# Altium PCB PCB.PcbDoc
Units mm, origin at the board's own origin, x right, y up, seen from the top; angles counter-clockwise.
Board outline 50 x 45 mm, 2 copper layers (Top Layer, Bottom Layer); 37 components, 26 nets, 126 pads, 36 vias.
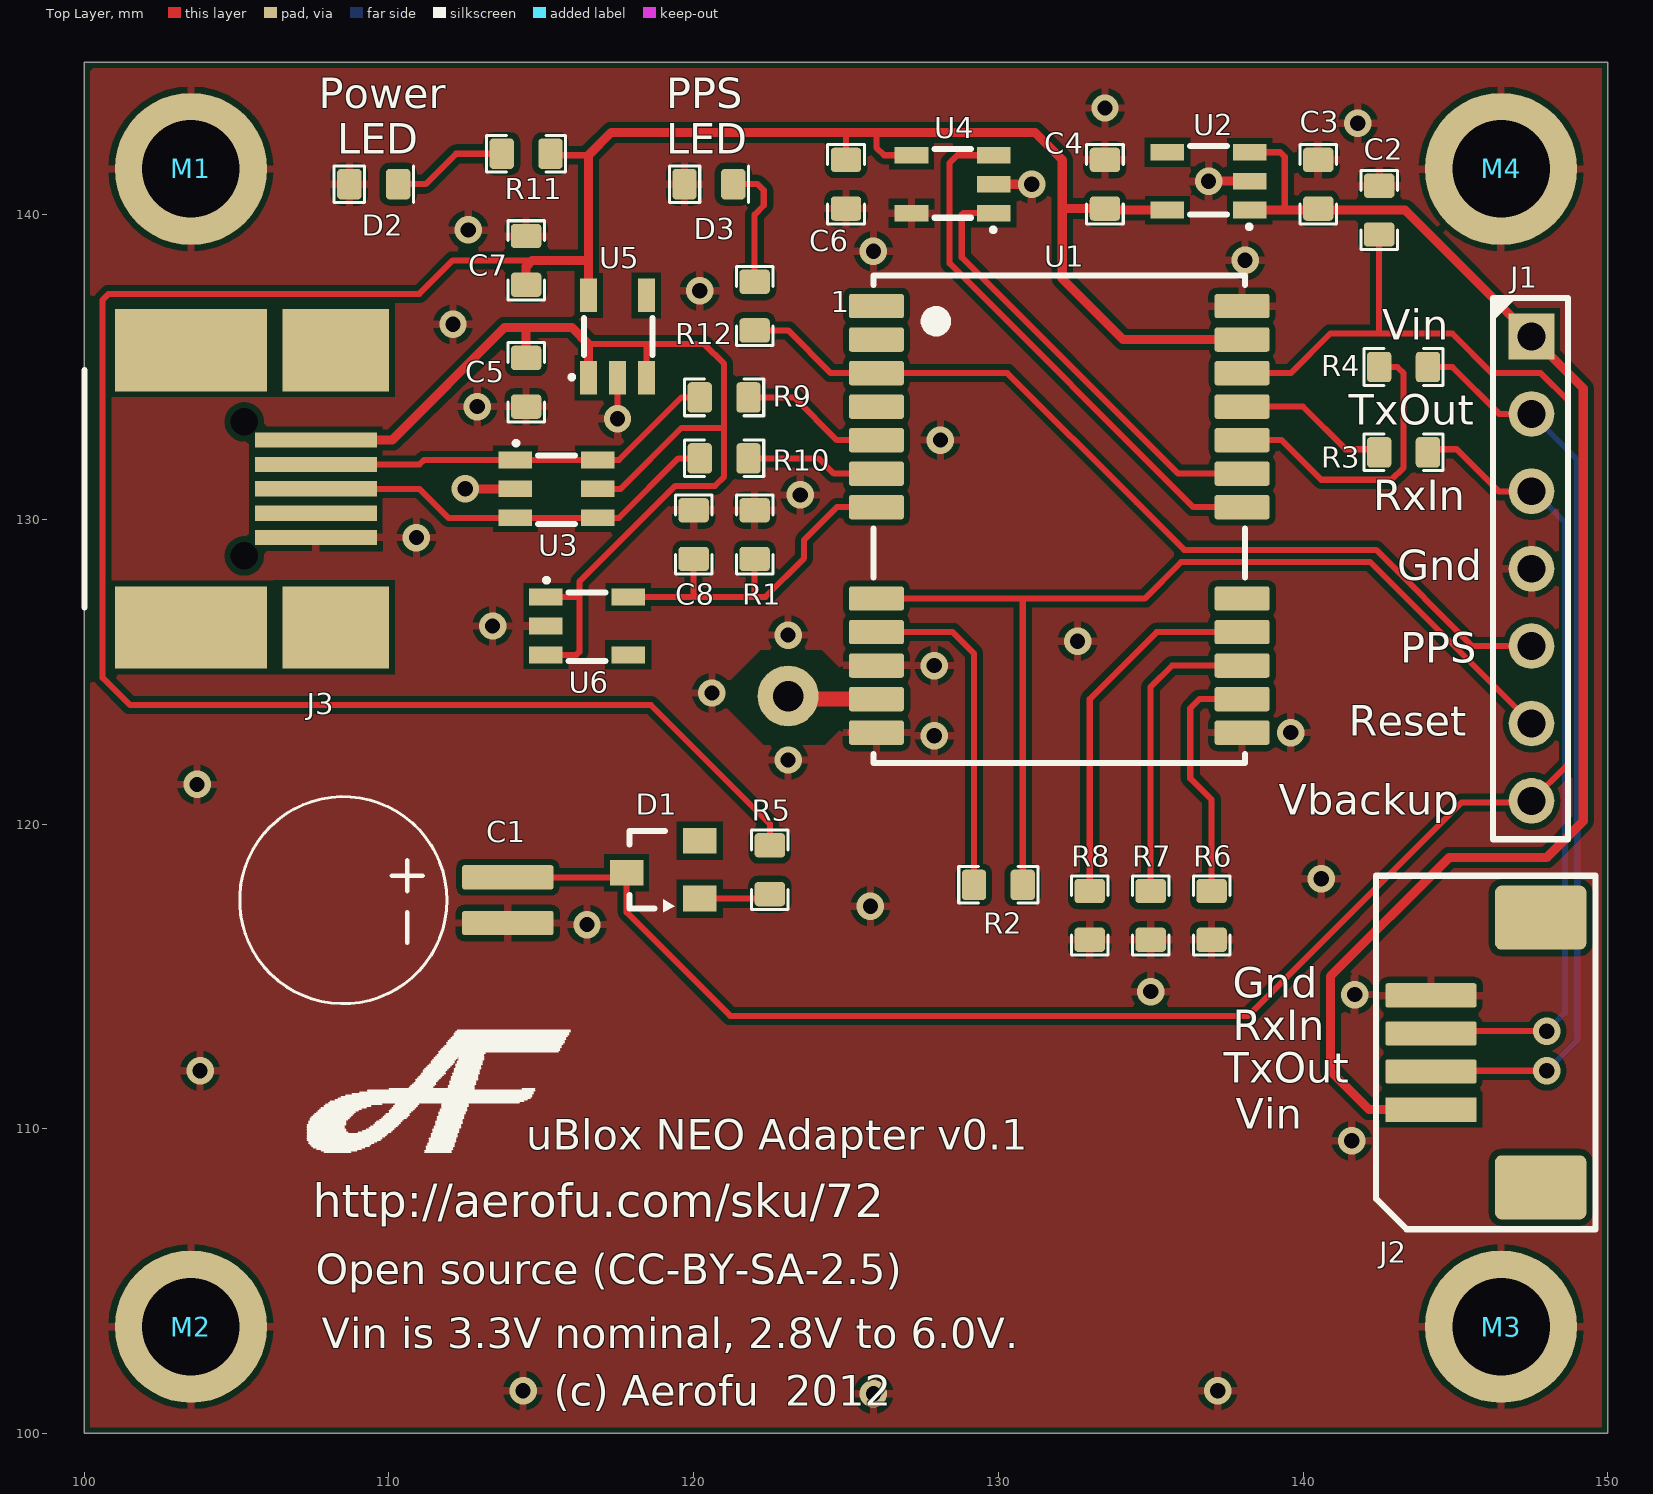
[diagram p0: Top Layer view]
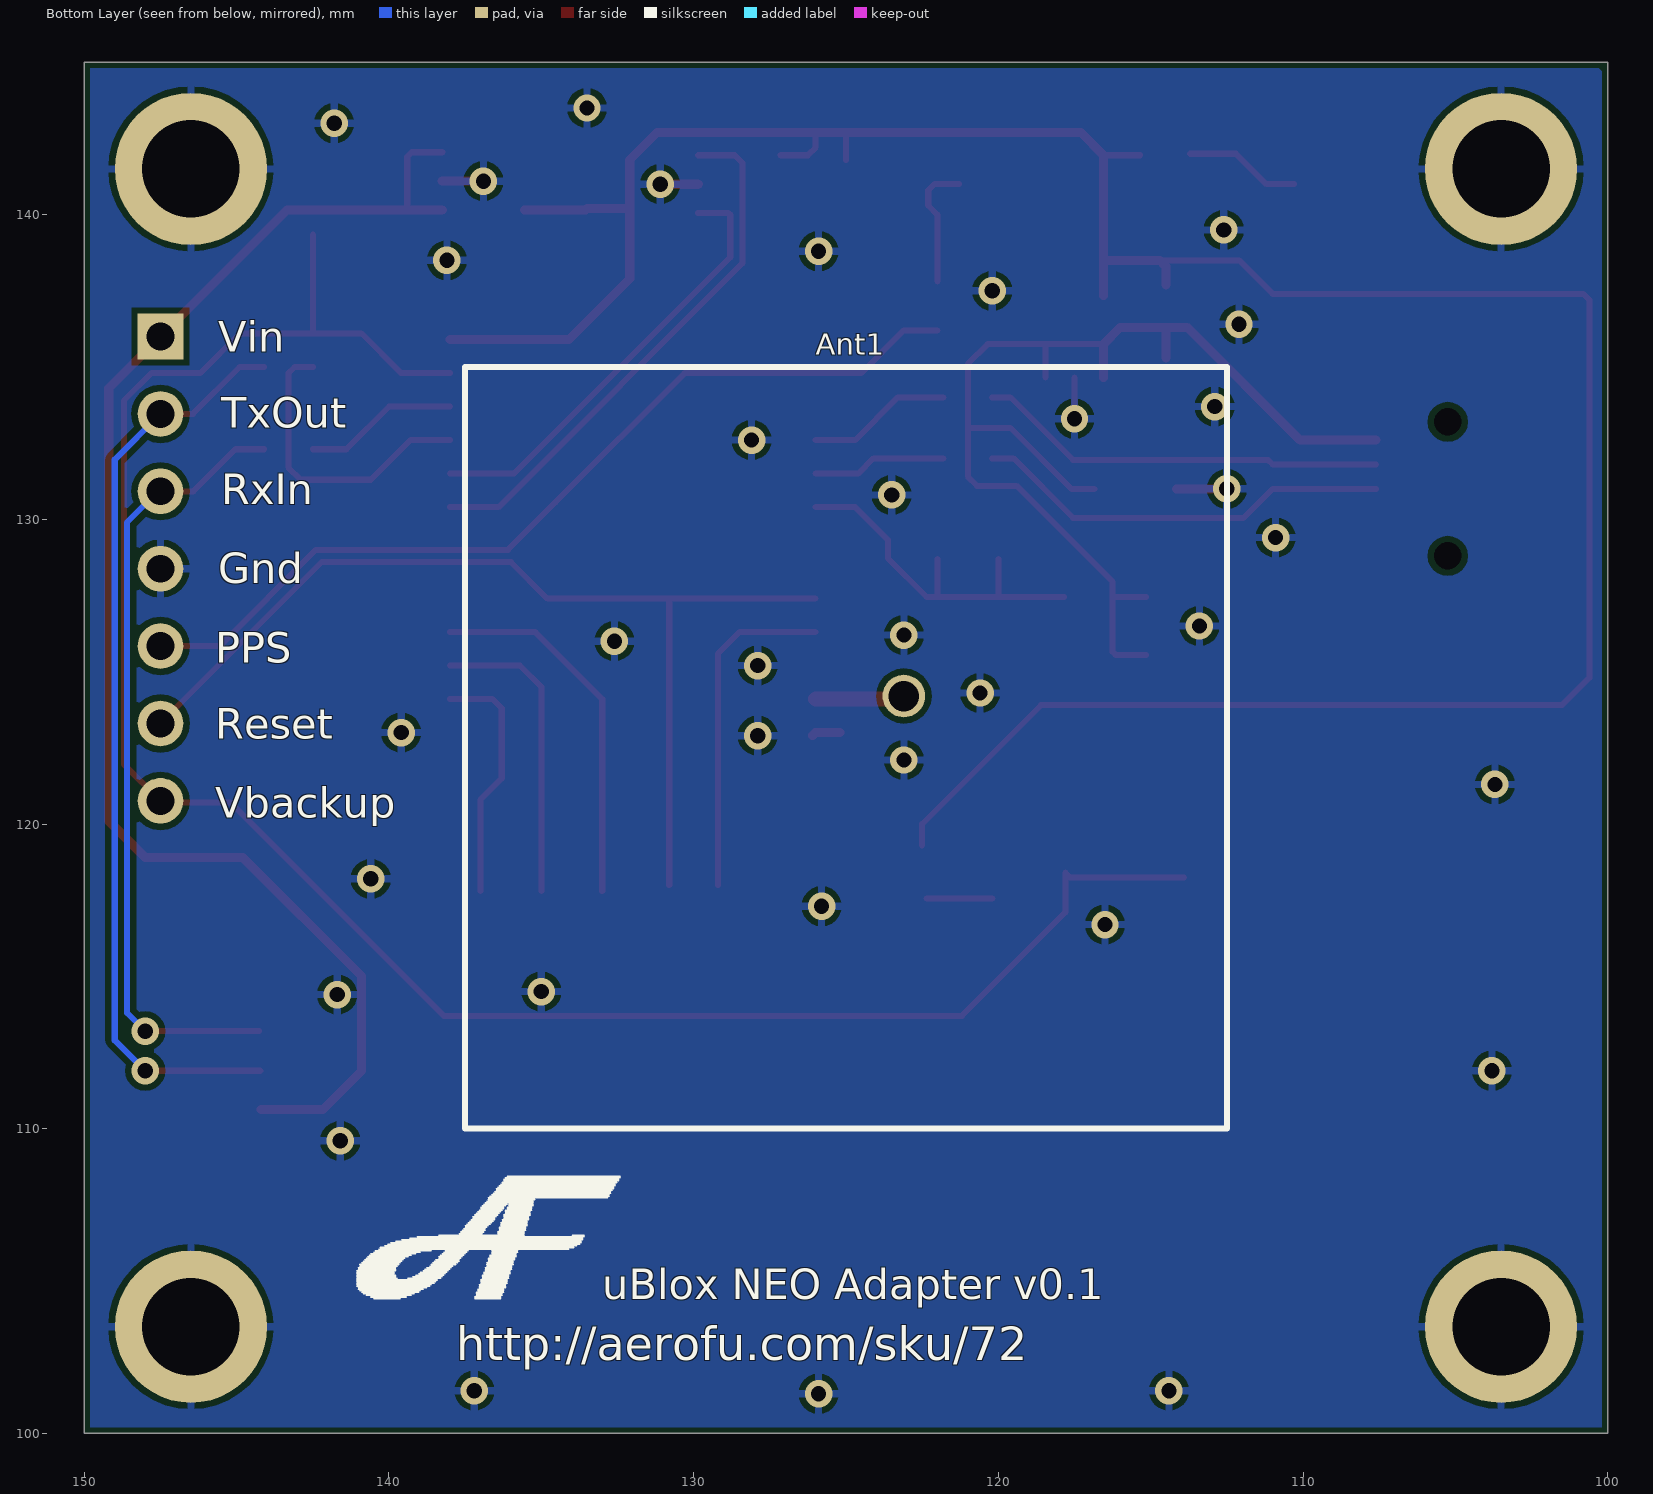
[diagram p1: Bottom Layer view, seen from below]

## Layer stack, top to bottom
Top Layer: signal copper 0.0356
Dielectric: dielectric 0.32, FR-4, Dk 4.8
Bottom Layer: signal copper 0.0356

## Board outline
100,145 150,145 150,100 100,100

## Design rules (kind name [scope] priority, off if disabled: settings)
Clearance [All] p1: gap=0.2
ComponentClearance [All] p1: gap=0.254 collisioncheckmode=0 verticalgap=0.254
HoleSize [All] p1: absolutevalues=TRUE maxlimit=5 minlimit=0.4 maxpercent=80.000 minpercent=20.000
PolygonConnect [All] p1: connectstyle=Relief reliefconductorwidth=0.254 reliefentries=4 polygonreliefangle="90 Angle"
RoomDefinition Schematic [InComponentClass('Schematic')] p1: confinementstyle=ConfineOut formatcopy=TRUE lockcomponents=FALSE outline 151.22,101.52 158.92,101.52 158.92,105.72 151.22,105.72
RoutingVias [All] p1: holewidth=0.711 width=1.27 viastyle="Through Hole" minholewidth=0.711 minwidth=1.27 maxholewidth=0.711 maxwidth=1.27
SolderMaskExpansion [All] p1: expansion=0.102
TestPointUsage [All] p1: valid=0 allowmultiple=FALSE
Testpoint [All] p1: side=15 testpointundercomponent=TRUE minsize=1.016 maxsize=2.54 preferedsize=1.524 minholesize=0 maxholesize=1.016 preferedholesize=0.813 testpointgrid=0.025 style=1023 order=0-112345678
Width [All] p1: maxlimit=0.5 minlimit=0.2 preferedwidth=0.2
17 further rules are at their usual default settings.

## Components (designator, comment, footprint, x,y, rotation, side; value= is the part's Value field where it differs from the comment)
Ant1 "Patch Antenna" Patch-25mm 125,122.5 r0 bottom locked
C1 "Capacitor_SuperCap" Supercap-6.8mm 108.5,117.5 r90 top
C2 "Capacitor" 0603 142.5,140.15 r270 top
C3 "Capacitor" 0603 140.5,141 r270 top
C4 "Capacitor" 0603 133.5,141 r270 top
C5 "Capacitor" 0603 114.5,134.5 r90 top
C6 "Capacitor" 0603 125,141 r90 top
C7 "Capacitor" 0603 114.5,138.5 r270 top
C8 "Capacitor" 0603 120,129.5 r270 top
D1 "Diode BAS116" SOT23-3 119,118.5 r90 top
D2 "Green" "0603 - LED" 109.5,141 r180 top
D3 "Red" "0603 - LED" 120.5,141 r180 top
J1 "SPI Header" HDR7X1-2.54 147.5,136 r0 top
J2 "Socket 4x1" "Molex Picoblade 4 Pin socket" 146,112.5 r90 top
J3 "USB-MiniB" Mini-USB 100,131 r0 top
M1 "Screw Hole" "MOUNT HOLE"#1 89,132 r0 top
M2 "Screw Hole" "MOUNT HOLE"#2 89.5,102 r0 top
M3 "Screw Hole" "MOUNT HOLE"#3 144.5,100.5 r0 top
M4 "Screw Hole" "MOUNT HOLE"#4 144,133.5 r0 top
R1 "Resistor" 0603 122,129.5 r270 top
R2 "Resistor" 0603 130,118 r180 top
R3 "Resistor" 0603 143.3,132.2 r180 top
R4 "Resistor" 0603 143.3,135 r180 top
R5 "Resistor" 0603 122.5,118.5 r90 top
R6 "Resistor" 0603 137,117 r90 top
R7 "Resistor" 0603 135,117 r90 top
R8 "Resistor" 0603 133,117 r90 top
R9 "Resistor" 0603 121,134 r180 top
R10 "Resistor" 0603 121,132 r180 top
R11 "Resistor" 0603 114.5,142 r0 top
R12 "Resistor" 0603 122,137 r270 top
U1 "uBlox-Neo" uBlox-NEO 132,130 r0 top
U2 "LT1761ES5-3" Sot23-5 136.9,141.1 r90 top
U3 "ESD Protection" Sot23-6 115.5,131 r270 top
U4 "32k EEPROM" Sot23-5 128.5,141 r90 top
U5 "LT1761ES5-3" Sot23-5 117.5,136 r0 top
U6 "TC1015-3.3VCT713" Sot23-5 116.5,126.5 r270 top

## Footprints (in the part's own frame and the unit in brackets; to place one, negate y for a bottom-side part, rotate by r counter-clockwise, add the part's x,y. Pads: shape width x height; smd on the part's side, far side on the other; paste and mask are expansions set on the pad)
0603 [mm] "Chip Capacitor; Body 1.6 x 0.8 mm (LxW typ)"
  rrect30% 0.8x1 smd: 1(-0.8,0) 2(0.8,0)
  silkscreen extent -1.3,-0.6 1.3,0.6
"0603 - LED" [mm] "LED Body 1.6 x 0.8 mm (LxW typ)"
  rrect30% 0.8x1 smd: 1(-0.8,0) 2(0.8,0)
  silkscreen extent -1.3,-0.6 1.3,0.6
HDR7X1-2.54 [mm] "Connector; Header; 7 Position 1 row"
  rect 1.5x1.5 hole 0.914: 1(0,0)
  round 1.5 hole 0.914: 2(0,-2.54) 3(0,-5.08) 4(0,-7.62) 5(0,-10.16) 6(0,-12.7) 7(0,-15.24)
  silkscreen extent -1.27,-16.5 1.2,1.27
Mini-USB [mm] "Suits: Hirose UX60SA-MB-5ST, TYCO 1734035-2, Molex 54819-0572"
  rect 5x2.7 smd: 0(3.5,-4.55) 0(3.5,4.55)
  rect 0x0 hole 0.9 unplated: 0(5.25,-2.2) 0(5.25,2.2)
  rect 3.5x2.7 smd: 0(8.25,-4.55) 0(8.25,4.55)
  rect 4x0.5 smd: 1(7.6,1.6) 2(7.6,0.8) 3(7.6,0) 4(7.6,-0.8) 5(7.6,-1.6)
  silkscreen extent 0,-3.9 0,3.9
"Molex Picoblade 4 Pin socket" [mm] "Connector; Header; 6 Position"
  rrect20% 2.1x3 smd: 0(-4.425,-1.8) 0(4.425,-1.8)
  rect 0.8x3 smd: 1(-1.875,1.8)
  rrect20% 0.8x3 smd: 2(-0.625,1.8) 3(0.625,1.8) 4(1.875,1.8)
  silkscreen extent -5.8,-3.6 5.8,3.6
"MOUNT HOLE"#1 [mm] "3.2mm mount hole"
  round 5 hole 3.2 unplated: 1(14.5,9.5)
"MOUNT HOLE"#2 [mm] "3.2mm mount hole"
  round 5 hole 3.2 unplated: 1(14,1.5)
"MOUNT HOLE"#3 [mm] "3.2mm mount hole"
  round 5 hole 3.2 unplated: 1(2,3)
"MOUNT HOLE"#4 [mm] "3.2mm mount hole"
  round 5 hole 3.2 unplated: 1(2.5,8)
Patch-25mm [mm] "25 mm Patch antenna, RHCP center pin location."
  round 1.4 / inner round 1.4 / far side round 2 hole 1: 1(-1.9,-1.7)
  silkscreen extent -12.5,-12.5 12.5,12.5
SOT23-3 [mm] "SOT-23; 3 Leads; Body 3.0 x 2.6 mm, inc. leads (LxW max)"
  rect 0.85x1.1 smd: 1(-0.95,-1.2) 2(0.95,-1.2) 3(-0.1,1.2)
  silkscreen extent -1.4,-0.38 1.28,1.1
Sot23-5 [mm] "Sot23-5L For Maxim, body 1.6 wide, pitch 0.95mm. 15th space between pads."
  rect 0.55x1.1 smd: 1(-0.95,-1.35) 2(0,-1.35) 3(0.95,-1.35) 4(0.95,1.35) 5(-0.95,1.35)
  silkscreen extent -1.51,-1.34 1.15,0.6
Sot23-6 [mm] "Sot23-6, body 1.6 wide, pitch 0.95mm. 15th space between pads."
  rect 0.55x1.1 smd: 1(-0.95,-1.35) 2(0,-1.35) 3(0.95,-1.35) 4(0.95,1.35) 5(0,1.35) 6(-0.95,1.35)
  silkscreen extent -1.51,-1.34 1.15,0.6
Supercap-6.8mm [mm] "Elna Supercap or equivelant"
  rrect20% 0.8x3 smd: 1(-0.75,-5.4) 2(0.75,-5.4)
  silkscreen extent -3.4,-3.4 3.4,3.4
uBlox-NEO [mm] "Footprint for uBlox NEO-5Q or similar."
  rrect20% 1.8x0.8 smd: 1(-6,7) 2(-6,5.9) 3(-6,4.8) 4(-6,3.7) 5(-6,2.6) 6(-6,1.5) 7(-6,0.4) 8(-6,-2.6) 9(-6,-3.7) 10(-6,-4.8) 11(-6,-5.9) 12(-6,-7) 13(6,-7) 14(6,-5.9) 15(6,-4.8) 16(6,-3.7) 17(6,-2.6) 18(6,0.4) 19(6,1.5) 20(6,2.6) 21(6,3.7) 22(6,4.8) 23(6,5.9) 24(6,7)
  silkscreen extent -6.1,-8 6.1,8

## Part data
C1: "SuperCap"
C2 C3 C4 C5 C6 C7 C8: "Capacitor (Semiconductor SIM Model)"
D1: "Silicon Low Leakage Diode"
D2 D3: library part LED
J1: library part "7 Way header 7x1"
J2: library part "4 Way Socket 4x1", "Socket"
J3: "USB Connector"
M1 M2 M3 M4: "Mount Hole"
U2 U5 U6: library part Regulator-5Pin
U3: library part USBLC6-2, "USBLC6-2"
U4: library part 24AA32A, "24AA32A"

## Via types
v1: diameter 0.9, hole 0.5, Top Layer to Bottom Layer, 36 vias

## Nets (pads, with @x,y where several pads share a name; then routed paths per layer and width w, separated by ;. In a path a pad name is that pad's centre, name@x,y a point inside that pad or via, vN(x,y) a via of type N, cw(c..) or ccw(c..) an arc to the next point about the centre after c; other vN are vias at no path point)
CFG-C0: R6.2 U1.14 | length 8.1
  Top Layer w0.2: R6.2 137,120.8 136.3,121.5 136.3,123.8 136.6,124.1 U1.14
CFG-C1: R7.2 U1.15 | length 10
  Top Layer w0.2: R7.2 135,124.5 135.7,125.2 U1.15
CFG-GPS: R8.2 U1.16 | length 12.2
  Top Layer w0.2: R8.2 133,124.1 135.2,126.3 U1.16
DM: R9.1 U1.5 | length 4.8
  Top Layer w0.2: R9.1 123.3,134 124.7,132.6 U1.5
DP: R10.1 U1.6 | length 4.4
  Top Layer w0.2: R10.1 124.1,132 124.6,131.5 U1.6
GND: C1.1 C2.1 C3.1 C4.1 C5.1 C6.1 C7.1 C8.1 D2.2 D3.2 J1.4 J2.4 J3.5 M1.1 M2.1 M3.1 M4.1 R1.1 R6.1 R7.1 R8.1 U1.10 U1.12 U1.13 U1.24 U2.2 U3.2 U4.2 U4.5 U5.2 U6.2 | length 6.4
  Top Layer w0.2: v1@117.5,133.4 U5.2
  Top Layer w0.3: v1(112.5,131) U3.2 ; U1.12@125.2,123 U1.12 U1.12@126.1,122.9 ; U4.2 v1(131.1,141) ; v1(136.9,141.1) U2.2
  other v1: 125.9,101.3 114.4,101.4 137.2,101.4 141.6,109.6 103.8,111.9 141.7,114.4 135,114.5 116.5,116.7 125.8,117.3 140.6,118.2 103.7,121.3 123.1,122.1 127.9,122.9 139.6,123 120.6,124.3 127.9,125.2 132.6,126 123.1,126.2 113.4,126.5 110.9,129.4 123.5,130.8 128.1,132.6 117.5,133.3 112.9,133.7 112.1,136.4 120.2,137.5 138.1,138.5 125.9,138.8 112.6,139.5 141.8,143 133.5,143.5
NetAnt1_1: Ant1.1 U1.11 | length 2.9
  Top Layer w0.5: Ant1.1 123.2,124.1 U1.11
NetD1_1: D1.1 R5.1 | length 2.1
  Top Layer w0.2: D1.1 R5.1@122.35,117.55
NetD2_1: D2.1 R11.1 | length 3.8
  Top Layer w0.2: D2.1 111.2,141 112.2,142 R11.1
NetD3_1: D3.1 R12.1 | length 4.2
  Top Layer w0.2: D3.1 122.1,141 122.3,140.8 122.3,140.3 122,140 R12.1
NetJ3_2: J3.2 R9.2 U3.1 U3.6 | length 13.5
  Top Layer w0.2: J3.2 111,131.8 111.15,131.95 117.55,131.95 119.6,134 R9.2
NetJ3_3: J3.3 R10.2 U3.3 U3.4 | length 13.8
  Top Layer w0.2: J3.3 111,131 111.95,130.05 117.55,130.05 119.5,132 R10.2
NetR2_2: R2.2 U1.9 | length 11.1
  Top Layer w0.2: U1.9 128.5,126.3 129.2,125.6 R2.2
NetR3_2: R3.2 U1.21 | length 5.1
  Top Layer w0.2: U1.21 140,133.7 141.4,132.3 R3.2@142.5,132.3
NetR4_2: R4.2 U1.20 | length 10
  Top Layer w0.2: U1.20 139.3,132.6 140.6,131.3 142.9,131.3 143.3,131.7 143.3,134.8 143.1,135 R4.2
NetU1_18: U1.18 U4.3 | length 17.8
  Top Layer w0.2: U4.3 128.65,141.95 128.4,141.7 128.4,138.4 136.4,130.4 U1.18
PPS: J1.5 R12.2 U1.3 | length 29.8
  Top Layer w0.2: R12.2 123.1,136.2 124.5,134.8 130.3,134.8 134.541,130.559 136.1,129 142.4,129 145.56,125.84 J1.5
RESET: J1.6 R2.1 U1.8 | length 33.5
  Top Layer w0.2: U1.8 134.8,127.4 136,128.6 142.2,128.6 J1.6 ; R2.1 130.8,127.3
RXIN: J1.3 J2.3 R3.1 | length 26.2
  Top Layer w0.2: R3.1@144.1,132.3 145.04,132.3 146.42,130.92 J1.3 ; J2.3@144.275,113.2 v1(148,113.2)
  Bottom Layer w0.2: J1.3 147.58,130.92 148.6,129.9 148.6,113.8 v1(148,113.2)
SCL: U1.19 U4.1 | length 14.6
  Top Layer w0.2: U4.1 128.85,140.05 128.8,140 128.8,138.6 135.9,131.5 U1.19
TXOUT: J1.2 J2.2 R4.1 | length 30.4
  Top Layer w0.2: R4.1 144.9,135 146.44,133.46 J1.2 ; J2.2@144.225,111.9 v1(148,111.9)
  Bottom Layer w0.2: J1.2 149,131.96 149,112.9 v1(148,111.9)
V3.0: C4.2 C6.2 C7.2 R5.2 R11.2 U1.23 U2.5 U4.4 U5.5 | length 92.9
  Top Layer w0.2: 114.7,138.5 112.1,138.5 111,137.4 100.8,137.4 100.6,137.2 100.6,124.8 101.5,123.9 118.6,123.9 122.5,120 R5.2 ; R11.2@115.35,141.95 116.55,141.95 ; 116.55,138.45 116.6,138.45 ; C6.2 125,142.6 ; 126,142.7 126,142.2 126.25,141.95 U4.4
  Top Layer w0.3: C7.2 114.5,138.3 114.7,138.5 116.55,138.5 116.55,141.95 117.3,142.7 131.2,142.7 132.1,141.8 132.1,137.9 134.1,135.9 U1.23 ; U5.5 116.55,138.4 ; 132.1,140.2 C4.2 ; C4.2@133.55,140.15 U2.5
V3.3-USB: C8.2 R1.2 U1.7 U6.5 | length 12.2
  Top Layer w0.2: U6.5 122.35,127.45 123.625,128.725 123.625,129.325 124.7,130.4 U1.7 ; 120,127.45 C8.2 ; 122,127.45 R1.2
V5-USB: C5.2 J3.1 U3.5 U5.1 U5.3 U6.1 U6.3 | length 38.1
  Top Layer w0.2: 114.4,136.3 114.5,136.2 ; U6.3 116.15,125.55 116.25,125.65 116.25,127.95 119.4,131.1 120.7,131.1 121,131.4 121,135.1 120.35,135.75 116.55,135.75 ; U6.1 116.25,127.45 ; U3.5 117.6,131 119.6,133 121,133 ; U5.3 118.45,135.7
  Top Layer w0.3: J3.1 110.1,132.6 113.8,136.3 116,136.3 116.55,135.75 U5.1 ; C5.2 114.5,136.3
VBACKUP: C1.2 C2.2 D1.3 J1.7 U1.22 | length 68.2
  Top Layer w0.2: C1.2 117.65,118.25 D1.3 117.8,117.1 121.2,113.7 138.2,113.7 145.2,120.7 J1.7@147.44,120.7 ; U1.22 139.6,134.8 140.9,136.1 144.9,136.1 146.2,134.8 147.8,134.8 148.7,133.9 148.7,121.96 J1.7 ; 142.5,136.1 C2.2
VIN: C3.2 J1.1 J2.1 U2.1 U2.3 | length 47.8
  Top Layer w0.2: U2.3 139.25,142.05 139.4,141.9 139.4,140.2
  Top Layer w0.3: U2.1 143.35,140.15 149.2,134.3 149.2,120.1 148,118.9 144.8,118.9 140.9,115 140.9,111.9 142.175,110.625 J2.1
pads on no net: D1.2 J2.0 J3.0 J3.4 U1.1 U1.2 U1.4 U1.17 U2.4 U5.4 U6.4

## Polygon pours and split planes (outlines as drawn)
GND on Top Layer "Gnd-Top" (solid, remove dead copper, pour order 1000): 100.2,100.2 149.8,100.2 149.8,144.8 100.2,144.8
GND on Bottom Layer "Gnd-Bottom" (solid, pour order 1001): 100.2,100.2 149.8,100.2 149.8,144.8 100.2,144.8

## Other copper
Top Layer:
  pour cut-out: 122.2,125.7 121.1,124.6 121.1,123.8 122.3,122.6 124.3,122.6 125.1,123.4 125.1,124.8 124.2,125.7

## Silkscreen, mask and mechanical layers (free items; w line width, h text height)
Top Overlay:
  drawing of 152 lines, arcs and shapes, not listed
  text "Power" at 107.7,143.5 h1
  text "PPS" at 119.1,143.5 h1
  text "LED" at 108.3,142 h1
  text "LED" at 119.1,142 h1
  text "1" at 124.5,136.8 h0.7
  text "Vin" at 142.6,135.9 h1
  text "TxOut" at 141.5,133.1 h1
  text "RxIn" at 142.3,130.3 h1
  text "Gnd" at 143.1,128 h1
  text "PPS" at 143.2,125.3 h1
  text "Reset" at 141.5,122.9 h1
  text "Vbackup" at 139.2,120.3 h1
  text "Gnd" at 137.7,114.3 h1
  text "RxIn" at 137.7,112.9 h1
  text "TxOut" at 137.4,111.5 h1
  text "Vin" at 137.8,110 h1
  text "uBlox NEO Adapter v0.1" at 114.5,109.3 h1
  text "http://aerofu.com/sku/72" at 107.5,107.1 h1.1
  text "Open source (CC-BY-SA-2.5)" at 107.6,104.9 h1
  text "Vin is 3.3V nominal, 2.8V to 6.0V." at 107.8,102.8 h1
  text "(c) Aerofu  2012" at 115.4,100.9 h1
Bottom Overlay:
  drawing of 152 lines, arcs and shapes, not listed
  text "Vin" at 145.6,135.5 h1
  text "TxOut" at 145.5,133 h1
  text "RxIn" at 145.5,130.5 h1
  text "Gnd" at 145.6,127.9 h1
  text "PPS" at 145.7,125.3 h1
  text "Reset" at 145.7,122.8 h1
  text "Vbackup" at 145.7,120.2 h1
  text "uBlox NEO Adapter v0.1" at 133,104.4 h1
  text "http://aerofu.com/sku/72" at 137.8,102.4 h1.1
Top Solder:
  lines w1: 106,129.8 109.2,129.8 ; 106,130.6 109.2,130.6 ; 106,131.4 109.2,131.4 ; 106,132.2 109.2,132.2 ; 125.6,123.1 125.6,127.3 ; 125.6,130.6 125.6,134.8 ; 125.6,132.7 125.6,136.9 ; 126.4,123 126.4,127.3 ; 126.4,130.5 126.4,134.8 ; 126.4,132.6 126.4,136.9 ; 137.6,123.2 137.6,127.4 ; 137.6,130.6 137.6,134.8 ; 137.6,132.8 137.6,137 ; 138.4,123.1 138.4,127.4 ; 138.4,130.5 138.4,134.8 ; 138.4,132.7 138.4,137
Mechanical 1:
  the board outline again, w0.152
Mechanical 16:
  drawing of 1874 lines, arcs and shapes, not listed
  text "1" at 36.246,189.611 h1.78
  text "2" at 108.89,189.611 h1.78
  text "3" at 182.042,189.611 h1.78
  text "4" at 254.94,189.611 h1.78
  text "A" at 1.905,166.599 h1.78
  text "A" at 288.925,166.599 h1.78
  text "B" at 1.905,118.542 h1.78
  text "B" at 288.925,118.542 h1.78
  text "C" at 1.905,70.028 h1.78
  text "ENGINEER:" at 173.99,33.02 h1.14
  text "TITLE:" at 212.09,33.02 h1.14
  text "PCB DESIGNER:" at 173.99,25.527 h1.14
  text "D" at 1.905,22.022 h1.78
  text "D" at 288.925,22.022 h1.78
  text "DATE:" at 173.99,17.78 h1.14
  text "PART NO.:" at 212.09,17.78 h1.14
  text "REV:" at 265.43,17.78 h1.14
  text "Altium Limited" at 140.97,15.24 h1.78
  text ".PRINT_DATE" at 175.26,14.732 h1.78
  text "12a Rodborough Rd" at 140.97,12.7 h1.78
  text "Frenchs Forest" at 140.97,10.16 h1.78
  text "FILE NAME:" at 173.99,10.16 h1.14
  text "DWG NO:" at 212.09,10.16 h1.14
  text "SCALE:" at 265.43,10.16 h1.14
  text "NSW 2086" at 140.97,7.62 h1.78
  text ".PCB_FILE_NAME_NO_PATH" at 175.26,7.112 h1.78
  text "1" at 36.246,1.651 h1.78
  text "2" at 108.89,1.651 h1.78
  text "3" at 182.042,1.651 h1.78
  text "4" at 254.94,1.651 h1.78
Drill Drawing:
  text ".legend" at 111.1,151.8 h1.52